# Altium PCB 180222.PcbDoc (part 4 of 5)
Units mil, origin at the board's own origin, x right, y up, seen from the top; angles counter-clockwise.
Board outline 6880.23 x 4505.03 mil, 2 copper layers (Top Layer, Bottom Layer); 136 components, 176 nets, 656 pads, 225 vias.
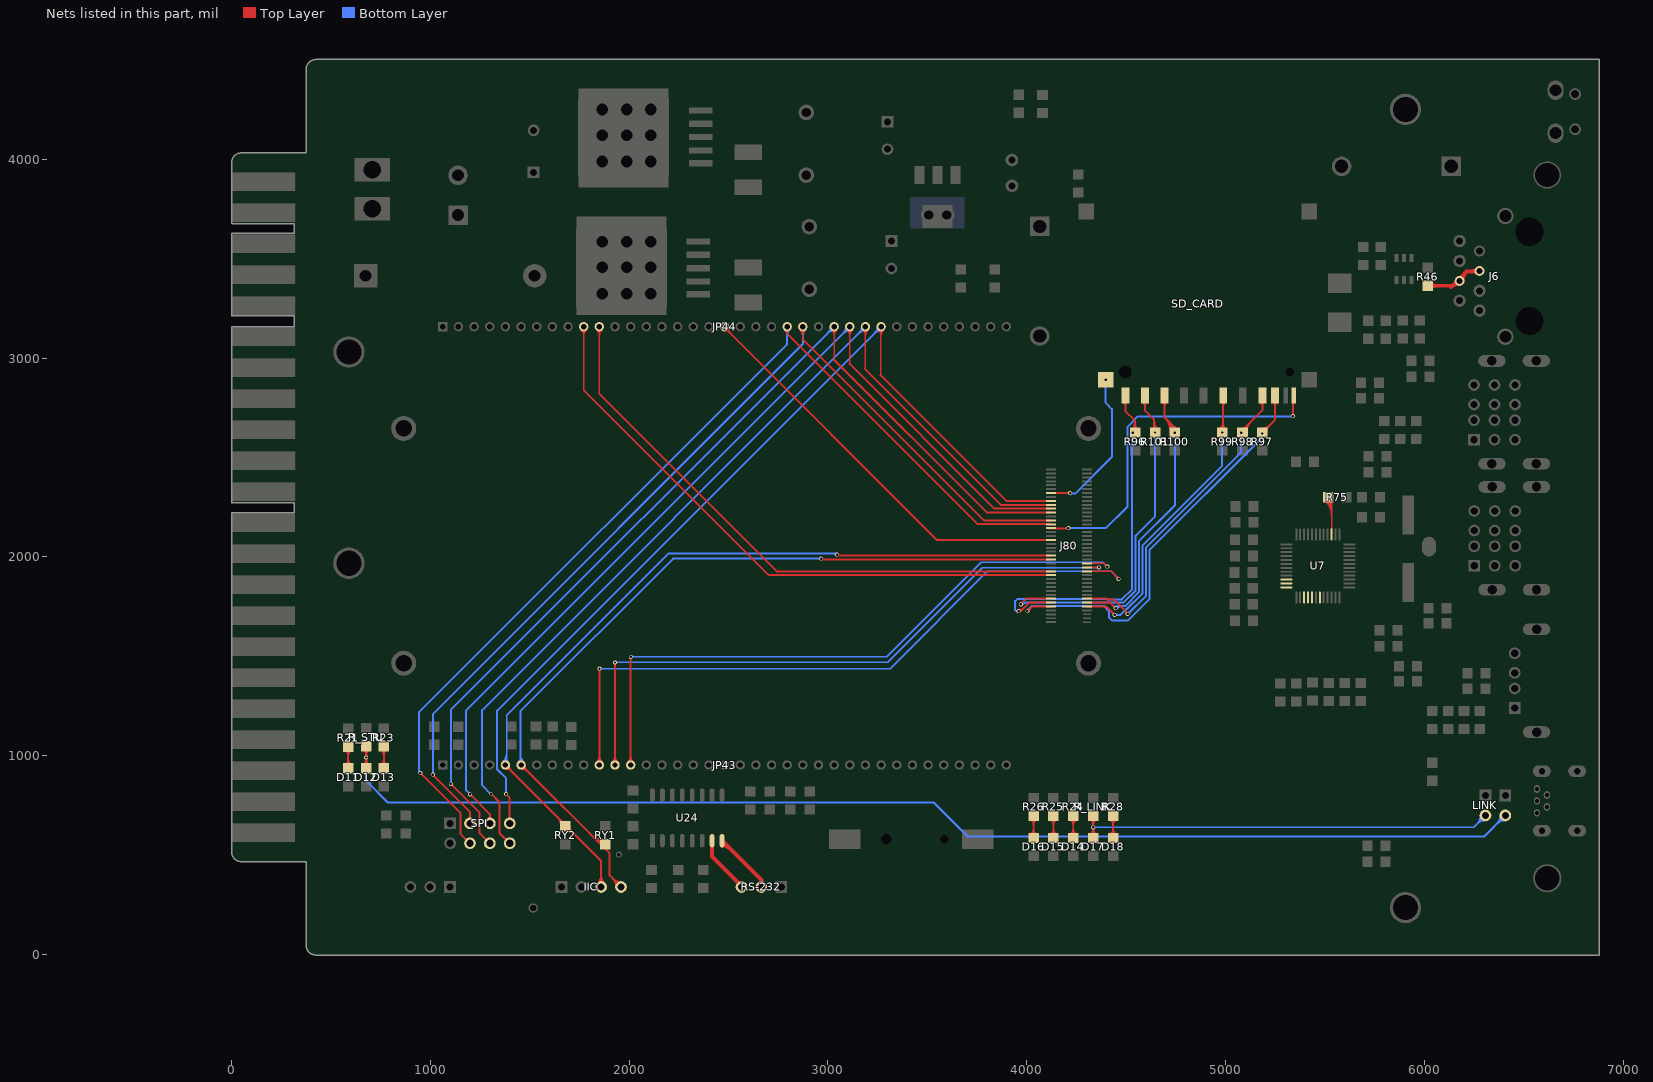
[diagram p4: the nets of this part, all layers, seen from the top]

## Via types
v1: diameter 20, hole 12, Top Layer to Bottom Layer, 169 vias
v2: diameter 30, hole 18, Top Layer to Bottom Layer, 30 vias
v3: diameter 35, hole 20, Top Layer to Bottom Layer, 25 vias
v4: diameter 50, hole 28, Top Layer to Bottom Layer, 1 vias

## Nets (pads, with @x,y where several pads share a name; then routed paths per layer and width w, separated by ;. In a path a pad name is that pad's centre, name@x,y a point inside that pad or via, vN(x,y) a via of type N, cw(c..) or ccw(c..) an arc to the next point about the centre after c; other vN are vias at no path point) (continued)
GPS-PPS: J80.15 JP43.12 | length 3640.2
  Top Layer w7: J80.15@4303.55,1947.73 v1@4366,1947.73 ; 4347.66,1947.73 ccw(c4347.66,1964.34) 4359.4,1952.6 cw(c4347.66,1964.34) 4347.66,1947.73 ; 4348.95,1947.73 cw(c4348.95,1932.95) 4359.4,1943.4 ccw(c4348.95,1932.95) 4348.95,1947.73
  Top Layer w10: v1@1926.22,1465.46 cw(c1918.22,1457.46) 1929.53,1457.46 ; JP43.12@1929.53,953.64 v1@1929.53,1470 ; 1929.53,1456.4 cw(c1942.36,1456.4) v1@1933.29,1465.46 ; JP43.12@1916.37,966.81 ccw(c1884.58,998.6) 1929.53,998.6 ; JP43.12@1916.37,966.81 ccw(c1884.58,998.6) 1929.53,998.6 ; JP43.12@1916.37,966.81 ccw(c1884.58,998.6) 1929.53,998.6 ; 1929.53,998.6 ccw(c1974.49,998.6) JP43.12@1942.7,966.81 ; 1929.53,998.6 ccw(c1974.49,998.6) JP43.12@1942.7,966.81 ; 1929.53,998.6 ccw(c1974.49,998.6) JP43.12@1942.7,966.81 ; v1@1924.78,1466.46 cw(c1913.3,1454.98) 1929.53,1454.98 ccw(c1913.3,1454.98) v1@1924.78,1466.46
  Bottom Layer w7: v1@1929.05,1470 3301,1470 3778,1947 v1@4364,1947 ; v1@1934.35,1464.4 cw(c1947.86,1450.89) 1947.86,1470 ; v1@1934.35,1473.6 ccw(c1943.03,1482.28) 1943.03,1470 ; 1944.01,1470 cw(c1944.01,1485.69) 1932.91,1474.6 ccw(c1944.01,1485.69) 1944.01,1470 ; 1944.01,1470 ccw(c1944.01,1454.31) 1932.91,1465.4 cw(c1944.01,1454.31) 1944.01,1470 ; 4345.89,1947 ccw(c4345.89,1966.11) 4359.4,1952.6 cw(c4345.89,1966.11) 4345.89,1947 ; 4350.72,1947 cw(c4350.72,1934.72) 4359.4,1943.4 ccw(c4350.72,1934.72) 4350.72,1947
  other v1: 1929.76,1469 4364,1948
GPS-TX: J80.16 JP43.13 | length 3725.3
  Top Layer w7: J80.16@4303.55,1969.42 4388.58,1969.42 4406,1952 v1(4406,1951) ; 4329.27,1968.42 ccw(c4329.27,1961.38) 4324.3,1966.36 cw(c4331.69,1958.97) 4331.69,1969.42 ; 4394.2,1963.8 cw(c4381.39,1951) 4399.5,1951 ccw(c4381.39,1951) 4394.2,1963.8 ; 4396.61,1961.39 ccw(c4406,1970.78) 4406,1957.5 cw(c4406,1970.78) 4396.61,1961.39
  Top Layer w10: v1@2005.22,1494.46 cw(c1997.84,1487.09) 2008.27,1487.09 ; JP43.13@2008.27,953.64 v1@2008.27,1499 ; 2008.27,1484.77 cw(c2021.99,1484.77) v1@2012.29,1494.46 ; JP43.13@1995.11,966.81 ccw(c1963.32,998.6) 2008.27,998.6 ; JP43.13@1995.11,966.81 ccw(c1963.32,998.6) 2008.27,998.6 ; JP43.13@1995.11,966.81 ccw(c1963.32,998.6) 2008.27,998.6 ; 2008.27,998.6 ccw(c2053.23,998.6) JP43.13@2021.44,966.81 ; 2008.27,998.6 ccw(c2053.23,998.6) JP43.13@2021.44,966.81 ; 2008.27,998.6 ccw(c2053.23,998.6) JP43.13@2021.44,966.81 ; v1@2003.78,1495.46 cw(c1992.92,1484.61) 2008.27,1484.61 ccw(c1992.92,1484.61) v1@2003.78,1495.46
  Bottom Layer w7: v1@2008.05,1499 3297,1499 3771,1973 4384,1973 v1(4406,1951) ; v1@2013.35,1493.4 cw(c2026.86,1479.89) 2026.86,1499 ; v1@2013.35,1502.6 ccw(c2022.03,1511.28) 2022.03,1499 ; 2023.01,1499 cw(c2023.01,1514.69) 2011.91,1503.6 ccw(c2023.01,1514.69) 2023.01,1499 ; 2023.01,1499 ccw(c2023.01,1483.31) 2011.91,1494.4 cw(c2023.01,1483.31) 2023.01,1499 ; 4394.9,1962.1 cw(c4383.81,1951) v1@4399.5,1951 ; 4394.9,1962.1 ccw(c4406,1973.19) v1@4406,1957.5 ; 4394.9,1962.1 cw(c4383.81,1951) v1@4399.5,1951 ; 4394.9,1962.1 ccw(c4406,1973.19) v1@4406,1957.5 ; 4394.9,1962.1 ccw(c4406,1973.19) v1@4406,1957.5 ; 4394.9,1962.1 cw(c4383.81,1951) v1@4399.5,1951
  other v1: 2008.76,1498
LED1: U7.3
LED2: U7.4
LED3: U7.5
LED4: U7.7
LED5: U7.48
LED6: U7.47
LED7: U7.46
N_SD_DETECT: J80.56 SD_CARD.10 | length 2006.4
  Top Layer w7: v1@4210,2144.42 v1@4211.42,2144.42 ; SD_CARD.10@5343.28,2796 SD_CARD.10@5343.28,2812.4
  Top Layer w10: J80.56@4111.55,2144.42 v1@4210,2144.42 ; 4196.52,2144.42 ccw(c4196.52,2158.48) v1@4206.46,2148.54 ; 4196.92,2144.42 cw(c4196.92,2130.92) v1@4206.46,2140.46 ; 4198.94,2144.42 ccw(c4198.94,2155.06) v1@4206.46,2147.54 ; 4199.34,2144.42 cw(c4199.34,2134.34) v1@4206.46,2141.46 ; v1(5339,2708) SD_CARD.10@5339,2796 ; v1@5335.46,2711.54 ccw(c5326.93,2720.07) 5339,2720.07 ; v1@5335.46,2711.54 ccw(c5326.93,2720.07) 5339,2720.07 ; v1@5335.46,2711.54 ccw(c5326.93,2720.07) 5339,2720.07 ; 5339,2720.07 ccw(c5351.07,2720.07) v1@5342.54,2711.54 ; 5339,2720.07 ccw(c5351.07,2720.07) v1@5342.54,2711.54 ; 5339,2720.07 ccw(c5351.07,2720.07) v1@5342.54,2711.54 ; 5339,2758.06 cw(c5370.07,2758.06) SD_CARD.10@5348.1,2780.03 ; 5339,2758.06 cw(c5370.07,2758.06) SD_CARD.10@5348.1,2780.03 ; 5339,2758.06 cw(c5370.07,2758.06) SD_CARD.10@5348.1,2780.03
  Bottom Layer w10: v1@4211,2145 4399,2145 4508,2254 4508,2655 4560,2707 v1@5341,2707 ; 5324.51,2707 ccw(c5324.51,2722.49) v1@5335.46,2711.54 ; 5324.51,2707 ccw(c5324.51,2722.49) v1@5335.46,2711.54 ; 5324.51,2707 ccw(c5324.51,2722.49) v1@5335.46,2711.54
  other v1: 4210,2145
N_SD_PROTECT: J80.47 SD_CARD.12 | length 885.5
  Top Layer w10: J80.47@4116.55,2322.25 v1@4218.75,2322.25 ; 4202.49,2322.25 cw(c4202.49,2302.49) v1@4216.46,2316.46 ; 4203.49,2321.75 ccw(c4203.49,2341.51) v1@4217.46,2327.54
  Bottom Layer w10: v1@4216,2324 4221,2319 4245,2319 4429,2503 4429,2744 4397,2776 v1@4397,2892 ; v1@4221.54,2315.46 cw(c4230.07,2306.93) 4230.07,2319 ; v1@4224.54,2322.54 ccw(c4233.07,2331.07) 4233.07,2319 ; 4397,2875.69 cw(c4413.85,2875.69) v1@4401.94,2887.61 ; 4397,2875.69 cw(c4413.85,2875.69) v1@4401.94,2887.61 ; 4397,2875.69 cw(c4413.85,2875.69) v1@4401.94,2887.61
  other v1: 4219,2321 4398.4,2891.14
NetC2_1: 
NetC2_2: 
NetC21_2: 
NetC37_1: 
NetC39_1: 
NetC42_1: 
NetC42_2: 
NetD1_2: 
NetD2_2: 
NetD3_2: 
NetD4_2: 
NetD5_2: 
NetD6_2: 
NetD7_2: 
NetD8_2: 
NetD11_2: D11.2 R21.2 | length 577.2
  Top Layer w10: D11.2@587,937 R21.2@587,1045.71 ; D11.2@572.44,951.56 ccw(c537.29,986.71) 587,986.71 ; D11.2@572.44,951.56 ccw(c537.29,986.71) 587,986.71 ; D11.2@572.44,951.56 ccw(c537.29,986.71) 587,986.71 ; R21.2@572.44,1031.15 cw(c537.29,996) 587,996 ; R21.2@572.44,1031.15 cw(c537.29,996) 587,996 ; R21.2@572.44,1031.15 cw(c537.29,996) 587,996 ; 587,986.71 ccw(c636.71,986.71) D11.2@601.56,951.56 ; 587,986.71 ccw(c636.71,986.71) D11.2@601.56,951.56 ; 587,986.71 ccw(c636.71,986.71) D11.2@601.56,951.56 ; 587,996 cw(c636.71,996) R21.2@601.56,1031.15 ; 587,996 cw(c636.71,996) R21.2@601.56,1031.15 ; 587,996 cw(c636.71,996) R21.2@601.56,1031.15
NetD12_2: ?.2@6408,700 D12.2 R_STU.2 | length 7208.1
  Top Layer w7: D12.2@678,930.35 D12.2@678,937
  Top Layer w10: D12.2@678,937 R_STU.2@678,1047.71 ; D12.2@663.44,951.56 ccw(c628.29,986.71) v1@678,986.71 ; D12.2@663.44,951.56 ccw(c628.29,986.71) v1@678,986.71 ; D12.2@663.44,951.56 ccw(c628.29,986.71) v1@678,986.71 ; R_STU.2@663.44,1033.15 cw(c628.3,998) v1@678,998 ; R_STU.2@663.44,1033.15 cw(c628.3,998) v1@678,998 ; R_STU.2@663.44,1033.15 cw(c628.3,998) v1@678,998 ; v1@674.47,987.82 cw(c665.93,979.28) 678,979.28 ; v1@674.47,987.82 cw(c665.93,979.28) 678,979.28 ; v1@674.47,987.82 cw(c665.93,979.28) 678,979.28 ; v1@674.47,994.89 ccw(c665.93,1003.42) 678,1003.43 ; v1@674.47,994.89 ccw(c665.93,1003.42) 678,1003.43 ; v1@674.47,994.89 ccw(c665.93,1003.42) 678,1003.43 ; 678,979.28 cw(c690.07,979.28) v1@681.54,987.82 ; 678,979.28 cw(c690.07,979.28) v1@681.54,987.82 ; 678,979.28 cw(c690.07,979.28) v1@681.54,987.82 ; v1@678,986.71 ccw(c727.71,986.71) D12.2@692.56,951.56 ; v1@678,986.71 ccw(c727.71,986.71) D12.2@692.56,951.56 ; v1@678,986.71 ccw(c727.71,986.71) D12.2@692.56,951.56 ; v1@678,997.99 cw(c727.72,997.99) R_STU.2@692.56,1033.15 ; v1@678,997.99 cw(c727.72,997.99) R_STU.2@692.56,1033.15 ; v1@678,997.99 cw(c727.72,997.99) R_STU.2@692.56,1033.15 ; 678,1003.43 ccw(c690.07,1003.43) v1@681.54,994.89 ; 678,1003.43 ccw(c690.07,1003.43) v1@681.54,994.89 ; 678,1003.43 ccw(c690.07,1003.43) v1@681.54,994.89
  Bottom Layer w10: v1(678,991.35) 678,874 787,765 3534,765 3705,594 6302,594 ?.2@6408,700 ; v1@674.47,987.82 cw(c665.93,979.28) 678,979.28 ; v1@674.47,987.82 cw(c665.93,979.28) 678,979.28 ; v1@674.47,987.82 cw(c665.93,979.28) 678,979.28 ; 678,979.28 cw(c690.07,979.28) v1@681.54,987.82 ; 678,979.28 cw(c690.07,979.28) v1@681.54,987.82 ; 678,979.28 cw(c690.07,979.28) v1@681.54,987.82 ; 6366.13,658.13 cw(c6408,616.26) ?.2@6408,675.47 ; 6366.13,658.13 ccw(c6324.26,700) ?.2@6383.47,700 ; 6366.13,658.13 cw(c6408,616.26) ?.2@6408,675.47 ; 6366.13,658.13 ccw(c6324.26,700) ?.2@6383.47,700 ; 6366.13,658.13 ccw(c6324.26,700) ?.2@6383.47,700 ; 6366.13,658.13 cw(c6408,616.26) ?.2@6408,675.47 ; 6383.2,675.2 cw(c6408,650.4) ?.2@6408,685.47 ; 6383.2,675.2 ccw(c6358.4,700) ?.2@6393.47,700 ; 6383.2,675.2 cw(c6408,650.4) ?.2@6408,685.47 ; 6383.2,675.2 ccw(c6358.4,700) ?.2@6393.47,700 ; 6383.2,675.2 ccw(c6358.4,700) ?.2@6393.47,700 ; 6383.2,675.2 cw(c6408,650.4) ?.2@6408,685.47
NetD13_2: D13.2 R23.2 | length 586.9
  Top Layer w7: D13.2@767,928.35 D13.2@767,937 ; R23.2@767,1041.35 R23.2@767,1046.71
  Top Layer w10: D13.2@767,937 R23.2@767,1041.35 ; D13.2@752.44,951.56 ccw(c717.29,986.71) 767,986.71 ; D13.2@752.44,951.56 ccw(c717.29,986.71) 767,986.71 ; D13.2@752.44,951.56 ccw(c717.29,986.71) 767,986.71 ; R23.2@752.44,1032.15 cw(c717.3,997) 767,997 ; R23.2@752.44,1032.15 cw(c717.3,997) 767,997 ; R23.2@752.44,1032.15 cw(c717.3,997) 767,997 ; 767,986.71 ccw(c816.71,986.71) D13.2@781.56,951.56 ; 767,986.71 ccw(c816.71,986.71) D13.2@781.56,951.56 ; 767,986.71 ccw(c816.71,986.71) D13.2@781.56,951.56 ; 767,996.99 cw(c816.72,996.99) R23.2@781.56,1032.15 ; 767,996.99 cw(c816.72,996.99) R23.2@781.56,1032.15 ; 767,996.99 cw(c816.72,996.99) R23.2@781.56,1032.15
NetD14_2: D14.2 R24.2 | length 1025.1
  Top Layer w7: R24.2@4235,697.35 4235,560 ; D14.2@4219.38,602.27 ccw(c4181.67,639.98) 4235,639.98 ; D14.2@4219.38,602.27 ccw(c4181.67,639.98) 4235,639.98 ; D14.2@4219.38,602.27 ccw(c4181.67,639.98) 4235,639.98 ; R24.2@4219.38,681.73 cw(c4181.67,644.02) 4235,644.02 ; R24.2@4219.38,681.73 cw(c4181.67,644.02) 4235,644.02 ; R24.2@4219.38,681.73 cw(c4181.67,644.02) 4235,644.02 ; D14.2@4224.33,597.32 ccw(c4198.57,623.08) 4235,623.08 ; D14.2@4224.33,597.32 ccw(c4198.57,623.08) 4235,623.08 ; D14.2@4224.33,597.32 ccw(c4198.57,623.08) 4235,623.08 ; R24.2@4224.33,686.68 cw(c4198.57,660.92) 4235,660.92 ; R24.2@4224.33,686.68 cw(c4198.57,660.92) 4235,660.92 ; R24.2@4224.33,686.68 cw(c4198.57,660.92) 4235,660.92 ; D14.2@4230.91,564.94 cw(c4229.98,560) 4235,560 ; D14.2@4230.91,564.94 cw(c4229.98,560) 4235,560 ; D14.2@4230.91,564.94 cw(c4229.98,560) 4235,560 ; 4235,560 cw(c4240.03,560) D14.2@4239.09,564.94 ; 4235,560 cw(c4240.03,560) D14.2@4239.09,564.94 ; 4235,560 cw(c4240.03,560) D14.2@4239.09,564.94 ; 4235,623.08 ccw(c4271.43,623.08) D14.2@4245.67,597.32 ; 4235,623.08 ccw(c4271.43,623.08) D14.2@4245.67,597.32 ; 4235,623.08 ccw(c4271.43,623.08) D14.2@4245.67,597.32 ; 4235,639.98 ccw(c4288.33,639.98) D14.2@4250.62,602.27 ; 4235,639.98 ccw(c4288.33,639.98) D14.2@4250.62,602.27 ; 4235,639.98 ccw(c4288.33,639.98) D14.2@4250.62,602.27 ; 4235,644.02 cw(c4288.33,644.02) R24.2@4250.62,681.73 ; 4235,644.02 cw(c4288.33,644.02) R24.2@4250.62,681.73 ; 4235,644.02 cw(c4288.33,644.02) R24.2@4250.62,681.73 ; 4235,660.92 cw(c4271.43,660.92) R24.2@4245.67,686.68 ; 4235,660.92 cw(c4271.43,660.92) R24.2@4245.67,686.68 ; 4235,660.92 cw(c4271.43,660.92) R24.2@4245.67,686.68
NetD15_2: D15.2 R25.2 | length 975.3
  Top Layer w7: D15.2@4135,568 R25.2@4135,697.35 ; D15.2@4119.38,602.27 ccw(c4081.66,639.98) 4135,639.98 ; D15.2@4119.38,602.27 ccw(c4081.66,639.98) 4135,639.98 ; D15.2@4119.38,602.27 ccw(c4081.66,639.98) 4135,639.98 ; R25.2@4119.38,681.73 cw(c4081.67,644.02) 4135,644.02 ; R25.2@4119.38,681.73 cw(c4081.67,644.02) 4135,644.02 ; R25.2@4119.38,681.73 cw(c4081.67,644.02) 4135,644.02 ; D15.2@4124.33,597.32 ccw(c4098.56,623.08) 4135,623.08 ; D15.2@4124.33,597.32 ccw(c4098.56,623.08) 4135,623.08 ; D15.2@4124.33,597.32 ccw(c4098.56,623.08) 4135,623.08 ; R25.2@4124.33,686.68 cw(c4098.57,660.92) 4135,660.92 ; R25.2@4124.33,686.68 cw(c4098.57,660.92) 4135,660.92 ; R25.2@4124.33,686.68 cw(c4098.57,660.92) 4135,660.92 ; 4135,623.07 ccw(c4171.43,623.07) D15.2@4145.67,597.32 ; 4135,623.07 ccw(c4171.43,623.07) D15.2@4145.67,597.32 ; 4135,623.07 ccw(c4171.43,623.07) D15.2@4145.67,597.32 ; 4135,639.97 ccw(c4188.33,639.97) D15.2@4150.62,602.27 ; 4135,639.97 ccw(c4188.33,639.97) D15.2@4150.62,602.27 ; 4135,639.97 ccw(c4188.33,639.97) D15.2@4150.62,602.27 ; 4135,644.02 cw(c4188.33,644.02) R25.2@4150.62,681.73 ; 4135,644.02 cw(c4188.33,644.02) R25.2@4150.62,681.73 ; 4135,644.02 cw(c4188.33,644.02) R25.2@4150.62,681.73 ; 4135,660.92 cw(c4171.43,660.92) R25.2@4145.67,686.68 ; 4135,660.92 cw(c4171.43,660.92) R25.2@4145.67,686.68 ; 4135,660.92 cw(c4171.43,660.92) R25.2@4145.67,686.68
NetD16_2: D16.2 R26.2 | length 961.3
  Top Layer w7: D16.2@4035,582 R26.2@4035,697.35 ; D16.2@4019.38,602.27 ccw(c3981.66,639.98) 4035,639.98 ; D16.2@4019.38,602.27 ccw(c3981.66,639.98) 4035,639.98 ; D16.2@4019.38,602.27 ccw(c3981.66,639.98) 4035,639.98 ; R26.2@4019.38,681.73 cw(c3981.67,644.02) 4035,644.02 ; R26.2@4019.38,681.73 cw(c3981.67,644.02) 4035,644.02 ; R26.2@4019.38,681.73 cw(c3981.67,644.02) 4035,644.02 ; D16.2@4024.33,597.32 ccw(c3998.56,623.08) 4035,623.08 ; D16.2@4024.33,597.32 ccw(c3998.56,623.08) 4035,623.08 ; D16.2@4024.33,597.32 ccw(c3998.56,623.08) 4035,623.08 ; R26.2@4024.33,686.68 cw(c3998.57,660.92) 4035,660.92 ; R26.2@4024.33,686.68 cw(c3998.57,660.92) 4035,660.92 ; R26.2@4024.33,686.68 cw(c3998.57,660.92) 4035,660.92 ; 4035,623.07 ccw(c4071.43,623.07) D16.2@4045.67,597.32 ; 4035,623.07 ccw(c4071.43,623.07) D16.2@4045.67,597.32 ; 4035,623.07 ccw(c4071.43,623.07) D16.2@4045.67,597.32 ; 4035,639.97 ccw(c4088.33,639.97) D16.2@4050.62,602.27 ; 4035,639.97 ccw(c4088.33,639.97) D16.2@4050.62,602.27 ; 4035,639.97 ccw(c4088.33,639.97) D16.2@4050.62,602.27 ; 4035,644.02 cw(c4088.33,644.02) R26.2@4050.62,681.73 ; 4035,644.02 cw(c4088.33,644.02) R26.2@4050.62,681.73 ; 4035,644.02 cw(c4088.33,644.02) R26.2@4050.62,681.73 ; 4035,660.92 cw(c4071.43,660.92) R26.2@4045.67,686.68 ; 4035,660.92 cw(c4071.43,660.92) R26.2@4045.67,686.68 ; 4035,660.92 cw(c4071.43,660.92) R26.2@4045.67,686.68
NetD17_2: D17.2 LINK.2 R_LINK.2 | length 3703.6
  Top Layer w7: D17.2@4335,572 v1(4335,640) ; R_LINK.2@4335,697.35 v1(4335,640) ; D17.2@4319.38,602.27 ccw(c4281.66,639.98) v1(4335,640) ; D17.2@4319.38,602.27 ccw(c4281.66,639.98) v1(4335,640) ; D17.2@4319.38,602.27 ccw(c4281.66,639.98) v1(4335,640) ; R_LINK.2@4319.38,681.73 cw(c4281.67,644.02) v1@4335,644.02 ; R_LINK.2@4319.38,681.73 cw(c4281.67,644.02) v1@4335,644.02 ; R_LINK.2@4319.38,681.73 cw(c4281.67,644.02) v1@4335,644.02 ; D17.2@4324.33,597.32 ccw(c4298.56,623.08) 4335,623.08 ; D17.2@4324.33,597.32 ccw(c4298.56,623.08) 4335,623.08 ; D17.2@4324.33,597.32 ccw(c4298.56,623.08) 4335,623.08 ; R_LINK.2@4324.33,686.68 cw(c4298.57,660.92) 4335,660.92 ; R_LINK.2@4324.33,686.68 cw(c4298.57,660.92) 4335,660.92 ; R_LINK.2@4324.33,686.68 cw(c4298.57,660.92) 4335,660.92 ; v1@4330.4,635.4 cw(c4319.31,624.31) 4335,624.31 ; v1@4330.4,635.4 cw(c4319.31,624.31) 4335,624.31 ; v1@4330.4,635.4 cw(c4319.31,624.31) 4335,624.31 ; v1@4330.4,644.6 ccw(c4319.31,655.69) 4335,655.69 ; v1@4330.4,644.6 ccw(c4319.31,655.69) 4335,655.69 ; v1@4330.4,644.6 ccw(c4319.31,655.69) 4335,655.69 ; 4335,623.07 ccw(c4371.43,623.07) D17.2@4345.67,597.32 ; 4335,623.07 ccw(c4371.43,623.07) D17.2@4345.67,597.32 ; 4335,623.07 ccw(c4371.43,623.07) D17.2@4345.67,597.32 ; 4335,624.31 cw(c4350.69,624.31) v1@4339.6,635.4 ; 4335,624.31 cw(c4350.69,624.31) v1@4339.6,635.4 ; 4335,624.31 cw(c4350.69,624.31) v1@4339.6,635.4 ; v1(4335,640) ccw(c4388.33,639.97) D17.2@4350.62,602.27 ; v1(4335,640) ccw(c4388.33,639.97) D17.2@4350.62,602.27 ; v1(4335,640) ccw(c4388.33,639.97) D17.2@4350.62,602.27 ; v1@4335,644.02 cw(c4388.33,644.02) R_LINK.2@4350.62,681.73 ; v1@4335,644.02 cw(c4388.33,644.02) R_LINK.2@4350.62,681.73 ; v1@4335,644.02 cw(c4388.33,644.02) R_LINK.2@4350.62,681.73 ; 4335,655.69 ccw(c4350.69,655.69) v1@4339.6,644.6 ; 4335,655.69 ccw(c4350.69,655.69) v1@4339.6,644.6 ; 4335,655.69 ccw(c4350.69,655.69) v1@4339.6,644.6 ; 4335,660.92 cw(c4371.43,660.92) R_LINK.2@4345.67,686.68 ; 4335,660.92 cw(c4371.43,660.92) R_LINK.2@4345.67,686.68 ; 4335,660.92 cw(c4371.43,660.92) R_LINK.2@4345.67,686.68
  Bottom Layer w7: v1(4335,640) 6248,640 LINK.2@6308,700 ; v1@4339.6,635.4 cw(c4350.69,624.31) 4350.69,640 ; v1@4339.6,635.4 cw(c4350.69,624.31) 4350.69,640 ; v1@4339.6,635.4 cw(c4350.69,624.31) 4350.69,640 ; v1@4339.6,644.6 ccw(c4350.69,655.69) 4350.69,640 ; v1@4339.6,644.6 ccw(c4350.69,655.69) 4350.69,640 ; v1@4339.6,644.6 ccw(c4350.69,655.69) 4350.69,640 ; 6263.57,655.57 cw(c6308,611.14) LINK.2@6308,673.97 ; 6263.57,655.57 ccw(c6219.14,700) LINK.2@6281.97,700 ; 6263.57,655.57 cw(c6308,611.14) LINK.2@6308,673.97 ; 6263.57,655.57 ccw(c6219.14,700) LINK.2@6281.97,700 ; 6263.57,655.57 ccw(c6219.14,700) LINK.2@6281.97,700 ; 6263.57,655.57 cw(c6308,611.14) LINK.2@6308,673.97 ; 6275.52,667.52 cw(c6308,635.04) LINK.2@6308,680.97 ; 6275.52,667.52 ccw(c6243.04,700) LINK.2@6288.97,700 ; 6275.52,667.52 cw(c6308,635.04) LINK.2@6308,680.97 ; 6275.52,667.52 ccw(c6243.04,700) LINK.2@6288.97,700 ; 6275.52,667.52 ccw(c6243.04,700) LINK.2@6288.97,700 ; 6275.52,667.52 cw(c6308,635.04) LINK.2@6308,680.97
NetD18_2: D18.2 R28.2 | length 939.3
  Top Layer w7: D18.2@4435,604 R28.2@4435,697.35 ; D18.2@4419.38,602.27 ccw(c4381.66,639.98) 4435,639.98 ; D18.2@4419.38,602.27 ccw(c4381.66,639.98) 4435,639.98 ; D18.2@4419.38,602.27 ccw(c4381.66,639.98) 4435,639.98 ; R28.2@4419.38,681.73 cw(c4381.67,644.02) 4435,644.02 ; R28.2@4419.38,681.73 cw(c4381.67,644.02) 4435,644.02 ; R28.2@4419.38,681.73 cw(c4381.67,644.02) 4435,644.02 ; D18.2@4424.33,597.32 ccw(c4398.56,623.08) 4435,623.08 ; D18.2@4424.33,597.32 ccw(c4398.56,623.08) 4435,623.08 ; D18.2@4424.33,597.32 ccw(c4398.56,623.08) 4435,623.08 ; R28.2@4424.33,686.68 cw(c4398.57,660.92) 4435,660.92 ; R28.2@4424.33,686.68 cw(c4398.57,660.92) 4435,660.92 ; R28.2@4424.33,686.68 cw(c4398.57,660.92) 4435,660.92 ; 4435,623.07 ccw(c4471.43,623.07) D18.2@4445.67,597.32 ; 4435,623.07 ccw(c4471.43,623.07) D18.2@4445.67,597.32 ; 4435,623.07 ccw(c4471.43,623.07) D18.2@4445.67,597.32 ; 4435,639.97 ccw(c4488.33,639.97) D18.2@4450.62,602.27 ; 4435,639.97 ccw(c4488.33,639.97) D18.2@4450.62,602.27 ; 4435,639.97 ccw(c4488.33,639.97) D18.2@4450.62,602.27 ; 4435,644.02 cw(c4488.33,644.02) R28.2@4450.62,681.73 ; 4435,644.02 cw(c4488.33,644.02) R28.2@4450.62,681.73 ; 4435,644.02 cw(c4488.33,644.02) R28.2@4450.62,681.73 ; 4435,660.92 cw(c4471.43,660.92) R28.2@4445.67,686.68 ; 4435,660.92 cw(c4471.43,660.92) R28.2@4445.67,686.68 ; 4435,660.92 cw(c4471.43,660.92) R28.2@4445.67,686.68
NetEU5_1: 
NetJ2_4: J6.4 J6.5 R46.2 | length 924.3
  Top Layer w20: R46.2@6018,3364.35 6141.35,3364.35 6214,3437 J6.5@6273,3437 ; R46.2@6030.01,3353.33 cw(c6056.62,3326.72) 6056.62,3364.35 ; R46.2@6030.01,3353.33 cw(c6056.62,3326.72) 6056.62,3364.35 ; R46.2@6030.01,3353.33 cw(c6056.62,3326.72) 6056.62,3364.35 ; R46.2@6030.01,3375.38 ccw(c6056.62,3401.99) 6056.62,3364.35 ; R46.2@6030.01,3375.38 ccw(c6056.62,3401.99) 6056.62,3364.35 ; R46.2@6030.01,3375.38 ccw(c6056.62,3401.99) 6056.62,3364.35 ; 6135.36,3358.36 cw(c6173.48,3320.23) J6.4@6177.02,3374.03 ; 6135.36,3358.36 cw(c6173.48,3320.23) J6.4@6177.02,3374.03 ; 6135.36,3358.36 cw(c6173.48,3320.23) J6.4@6177.02,3374.03 ; J6.4@6193,3389 cw(c6258.18,3389) 6212.09,3435.09 ; J6.4@6193,3389 cw(c6258.18,3389) 6212.09,3435.09 ; J6.4@6193,3389 cw(c6258.18,3389) 6212.09,3435.09 ; 6236.96,3437 ccw(c6236.96,3480.04) J6.5@6267.39,3449.61 ; 6236.96,3437 ccw(c6236.96,3480.04) J6.5@6267.39,3449.61 ; 6236.96,3437 ccw(c6236.96,3480.04) J6.5@6267.39,3449.61 ; 6246.62,3437 cw(c6246.62,3407.62) J6.5@6267.39,3428.39 ; 6246.62,3437 cw(c6246.62,3407.62) J6.5@6267.39,3428.39 ; 6246.62,3437 cw(c6246.62,3407.62) J6.5@6267.39,3428.39
NetR5_1: 
NetR6_1: 
NetR8_1: 
NetR45_1: 
NetR60_2: 
NTRST: J80.14 JP43.11 | length 3988.9
  Top Layer w7: J80.14@4303.55,1927.05 4425.95,1927.05 v1@4464.5,1888.5 ; 4451.9,1901.1 cw(c4440.81,1890) v1@4456.5,1890 ; 4451.9,1901.1 ccw(c4463,1912.19) v1@4463,1896.5 ; 4451.9,1901.1 cw(c4440.81,1890) v1@4456.5,1890 ; 4451.9,1901.1 ccw(c4463,1912.19) v1@4463,1896.5 ; 4451.9,1901.1 ccw(c4463,1912.19) v1@4463,1896.5 ; 4451.9,1901.1 cw(c4440.81,1890) v1@4456.5,1890 ; J80.14@4324.3,1929.11 ccw(c4329.27,1934.08) 4329.27,1927.05 cw(c4329.27,1934.08) J80.14@4324.3,1929.11
  Top Layer w10: JP43.11@1850.79,953.64 v1@1850.79,1439 ; 1850.79,1423.61 cw(c1866.14,1423.61) v1@1855.29,1434.46 ; JP43.11@1837.63,966.81 ccw(c1805.84,998.6) 1850.79,998.6 ; JP43.11@1837.63,966.81 ccw(c1805.84,998.6) 1850.79,998.6 ; JP43.11@1837.63,966.81 ccw(c1805.84,998.6) 1850.79,998.6 ; 1850.79,998.6 ccw(c1895.75,998.6) JP43.11@1863.96,966.81 ; 1850.79,998.6 ccw(c1895.75,998.6) JP43.11@1863.96,966.81 ; 1850.79,998.6 ccw(c1895.75,998.6) JP43.11@1863.96,966.81 ; v1@1846.78,1435.46 cw(c1837.08,1425.77) 1850.79,1425.77 ccw(c1837.08,1425.77) v1@1846.78,1435.46 ; v1@1850.79,1428.09 cw(c1861.23,1428.09) 1853.85,1435.46 ccw(c1861.23,1428.09) v1@1850.79,1428.09
  Bottom Layer w7: v1@1850.79,1439 3313,1439 3801.5,1927.5 4424.5,1927.5 v1@4464,1888 ; v1@1856.35,1433.4 cw(c1869.86,1419.89) 1869.86,1439 ; v1@1856.35,1442.6 ccw(c1865.03,1451.28) 1865.03,1439 ; 1866.01,1439 cw(c1866.01,1454.69) 1854.91,1443.6 ccw(c1866.01,1454.69) 1866.01,1439 ; 1866.01,1439 ccw(c1866.01,1423.31) 1854.91,1434.4 cw(c1866.01,1423.31) 1866.01,1439 ; 4450.2,1901.8 ccw(c4463,1914.61) v1@4463,1896.5 ; 4450.2,1901.8 ccw(c4463,1914.61) v1@4463,1896.5 ; 4450.2,1901.8 ccw(c4463,1914.61) v1@4463,1896.5 ; 4452.61,1899.39 cw(c4443.22,1890) v1@4456.5,1890 ; 4452.61,1899.39 cw(c4443.22,1890) v1@4456.5,1890 ; 4452.61,1899.39 cw(c4443.22,1890) v1@4456.5,1890
  other v1: 1851.76,1438 4463,1890
R_D: RS-232.2 U24.8 | length 366.1
  Top Layer w20: U24.8@2468,549.54 cw(c2468,492.89) 2508.06,532.94 ; U24.8@2468,569.54 cw(c2468,561.17) U24.8@2473.91,567.09 ; U24.8@2468,573 2666,375 RS-232.2@2666,340
REXT: R75.2 U7.27 | length 1077
  Top Layer w7: U7.27@5533.78,2113.81 R75.2@5533.78,2300 ; R75.2@5501.73,2283.39 cw(c5424.37,2206.03) 5533.78,2206.03 ; R75.2@5501.73,2283.39 cw(c5424.37,2206.03) 5533.78,2206.03 ; R75.2@5501.73,2283.39 cw(c5424.37,2206.03) 5533.78,2206.03 ; R75.2@5506.68,2288.34 cw(c5441.27,2222.93) 5533.78,2222.93 ; R75.2@5506.68,2288.34 cw(c5441.27,2222.93) 5533.78,2222.93 ; R75.2@5506.68,2288.34 cw(c5441.27,2222.93) 5533.78,2222.93 ; R75.2@5511.63,2293.29 cw(c5458.17,2239.83) 5533.78,2239.83 ; R75.2@5511.63,2293.29 cw(c5458.17,2239.83) 5533.78,2239.83 ; R75.2@5511.63,2293.29 cw(c5458.17,2239.83) 5533.78,2239.83 ; R75.2@5516.58,2298.24 cw(c5475.07,2256.73) 5533.78,2256.73 ; R75.2@5516.58,2298.24 cw(c5475.07,2256.73) 5533.78,2256.73 ; R75.2@5516.58,2298.24 cw(c5475.07,2256.73) 5533.78,2256.73 ; R75.2@5521.53,2303.19 cw(c5491.97,2273.63) R75.2@5533.78,2273.63 ; R75.2@5521.53,2303.19 cw(c5491.97,2273.63) R75.2@5533.78,2273.63 ; R75.2@5521.53,2303.19 cw(c5491.97,2273.63) R75.2@5533.78,2273.63
RTCK: J80.59 JP44.19 | length 2482.6
  Top Layer w7: JP44.19@2480.72,3138.24 cw(c2480.72,3101.92) 2506.4,3127.6 ; JP44.19@2480.72,3138.24 cw(c2480.72,3101.92) 2506.4,3127.6 ; JP44.19@2480.72,3138.24 cw(c2480.72,3101.92) 2506.4,3127.6 ; JP44.19@2486.84,3158.36 ccw(c2513.88,3158.36) 2494.76,3139.24 ; JP44.19@2486.84,3158.36 ccw(c2513.88,3158.36) 2494.76,3139.24 ; JP44.19@2486.84,3158.36 ccw(c2513.88,3158.36) 2494.76,3139.24 ; JP44.19@2493.84,3158.36 ccw(c2537.78,3158.36) 2506.71,3127.29 ; JP44.19@2493.84,3158.36 ccw(c2537.78,3158.36) 2506.71,3127.29 ; JP44.19@2493.84,3158.36 ccw(c2537.78,3158.36) 2506.71,3127.29 ; JP44.19@2500.84,3158.36 ccw(c2561.68,3158.36) 2518.66,3115.34 ; JP44.19@2500.84,3158.36 ccw(c2561.68,3158.36) 2518.66,3115.34 ; JP44.19@2500.84,3158.36 ccw(c2561.68,3158.36) 2518.66,3115.34
  Top Layer w10: JP44.19@2479,3155 3548.47,2085.53 J80.59@4122.45,2085.53
SCL: IIC.4 J80.64 JP43.6 RY1.2 | length 4609.1
  Top Layer w10: JP43.6@1457.09,935.02 cw(c1457.09,890.06) 1488.88,921.85 cw(c1520.67,953.64) JP43.6@1475.72,953.64 ; JP43.6@1457.09,953.64 1902,508.73 1902,399 IIC.4@1959,342 ; 1803.51,607.22 ccw(c1879.02,682.72) RY1.2@1879.02,575.94 ; 1820.58,590.15 ccw(c1879.02,648.58) RY1.2@1879.02,565.94 ; 1837.65,573.08 ccw(c1879.02,614.44) RY1.2@1879.02,555.94 ; 1917.42,383.58 cw(c1873.84,340) IIC.4@1935.47,340 ; 1919.84,381.16 ccw(c1960,421.33) IIC.4@1960,364.53 ; 1934.49,366.51 cw(c1907.99,340) IIC.4@1945.47,340 ; 1936.91,364.09 ccw(c1960,387.19) IIC.4@1960,354.53 ; v1@2972.9,1987.1 J80.64@4122.45,1987.1
  Bottom Layer w7: JP43.6@1442.87,967.87 ccw(c1415.99,994.75) 1454,994.75 ; JP43.6@1447.82,962.92 ccw(c1432.88,977.85) 1454,977.85 ; 1454,992.79 ccw(c1496.24,992.79) JP43.6@1466.37,962.92 ; 1454,1009.69 ccw(c1513.14,1009.69) JP43.6@1471.32,967.87
  Bottom Layer w10: JP43.6@1454,953.64 1454,1223 2222.4,1991.4 v1(2966.84,1991.4)
SD_CLK: J80.5 R99.1 SD_CARD.5 | length 2177.1
  Top Layer w7: v1(4984,2625.91) R99.1@4984,2632.95
  Top Layer w10: J80.5@4303.55,1750.88 4400.12,1750.88 v1@4442,1709 ; R99.1@4988.95,2632.95 SD_CARD.5@4988.95,2812.4 ; R99.1@4970.43,2640.47 ccw(c4925.7,2685.2) 4988.95,2685.2 ; R99.1@4970.43,2640.47 ccw(c4925.7,2685.2) 4988.95,2685.2 ; R99.1@4970.43,2640.47 ccw(c4925.7,2685.2) 4988.95,2685.2 ; R99.1@4977.5,2633.39 ccw(c4949.84,2661.05) 4988.95,2661.05 ; R99.1@4977.5,2633.39 ccw(c4949.84,2661.05) 4988.95,2661.05 ; R99.1@4977.5,2633.39 ccw(c4949.84,2661.05) 4988.95,2661.05 ; SD_CARD.5@4978.57,2782.33 cw(c4953.5,2757.26) 4988.95,2757.26 ; SD_CARD.5@4978.57,2782.33 cw(c4953.5,2757.26) 4988.95,2757.26 ; SD_CARD.5@4978.57,2782.33 cw(c4953.5,2757.26) 4988.95,2757.26 ; R99.1@4980.47,2629.44 ccw(c4959.97,2649.93) R99.1@4988.95,2649.93 ; R99.1@4980.47,2629.44 ccw(c4959.97,2649.93) R99.1@4988.95,2649.93 ; R99.1@4980.47,2629.44 ccw(c4959.97,2649.93) R99.1@4988.95,2649.93 ; 4988.95,2666.04 ccw(c5025.12,2666.04) R99.1@4999.54,2640.47 ; 4988.95,2666.04 ccw(c5025.12,2666.04) R99.1@4999.54,2640.47 ; 4988.95,2666.04 ccw(c5025.12,2666.04) R99.1@4999.54,2640.47 ; 4988.95,2757.26 cw(c5024.41,2757.26) SD_CARD.5@4999.34,2782.33 ; 4988.95,2757.26 cw(c5024.41,2757.26) SD_CARD.5@4999.34,2782.33 ; 4988.95,2757.26 cw(c5024.41,2757.26) SD_CARD.5@4999.34,2782.33 ; 4432.76,1718.24 ccw(c4443,1728.49) 4443,1714 cw(c4443,1728.49) 4432.76,1718.24 ; 4435.17,1715.83 cw(c4428.34,1709) 4438,1709 ccw(c4428.34,1709) 4435.17,1715.83
  Bottom Layer w10: v1(4443,1709) 4472,1709 4486,1723 4486,1723.11 4498.89,1736 4502.41,1736 4582.16,1815.75 4582.16,2057.16 4983,2458 v1@4983,2627 ; 4455.07,1709 cw(c4455.07,1721.07) 4446.54,1712.54 ccw(c4455.07,1721.07) 4455.07,1709 ; 4455.07,1709 ccw(c4455.07,1696.93) 4446.54,1705.46 cw(c4455.07,1696.93) 4455.07,1709 ; 4983,2611.42 cw(c4998.49,2611.42) v1@4987.54,2622.37 ; 4983,2611.42 cw(c4998.49,2611.42) v1@4987.54,2622.37 ; 4983,2611.42 cw(c4998.49,2611.42) v1@4987.54,2622.37
SD_CMD: J80.6 R100.1 SD_CARD.2 | length 2583
  Top Layer w7: v1@4447,1742 v1@4450,1739 ; R100.1@4746,2625.91 4746,2651 4746,2656 ; R100.1@4739.38,2646.98 ccw(c4736.55,2656) 4746,2656 ; R100.1@4739.38,2646.98 ccw(c4736.55,2656) 4746,2656 ; R100.1@4739.38,2646.98 ccw(c4736.55,2656) 4746,2656 ; R100.1@4741.4,2629.6 ccw(c4730.31,2640.69) R100.1@4746,2640.69 ; R100.1@4741.4,2629.6 ccw(c4730.31,2640.69) R100.1@4746,2640.69 ; R100.1@4741.4,2629.6 ccw(c4730.31,2640.69) R100.1@4746,2640.69 ; R100.1@4746,2640.69 ccw(c4761.69,2640.69) R100.1@4750.6,2629.6 ; R100.1@4746,2640.69 ccw(c4761.69,2640.69) R100.1@4750.6,2629.6 ; R100.1@4746,2640.69 ccw(c4761.69,2640.69) R100.1@4750.6,2629.6 ; 4746,2656 ccw(c4755.45,2656) R100.1@4752.62,2646.98 ; 4746,2656 ccw(c4755.45,2656) R100.1@4752.62,2646.98 ; 4746,2656 ccw(c4755.45,2656) R100.1@4752.62,2646.98
  Top Layer w10: J80.6@4303.55,1770.57 4304.12,1770 4421,1770 v1(4448,1743) ; SD_CARD.2@4693.68,2812.4 4693.68,2703.32 4746,2651 R100.1@4747,2650 ; 4439.46,1751.54 cw(c4430.93,1743) 4443,1743 ccw(c4430.93,1743) 4439.46,1751.54 ; 4439.46,1751.54 ccw(c4448,1760.07) 4448,1748 cw(c4448,1760.07) 4439.46,1751.54 ; SD_CARD.2@4683.29,2782.33 cw(c4658.22,2757.26) 4693.68,2757.26 ; SD_CARD.2@4683.29,2782.33 cw(c4658.22,2757.26) 4693.68,2757.26 ; SD_CARD.2@4683.29,2782.33 cw(c4658.22,2757.26) 4693.68,2757.26 ; 4691.43,2705.57 cw(c4611.76,2625.91) R100.1@4724.43,2625.91 ; 4691.43,2705.57 cw(c4611.76,2625.91) R100.1@4724.43,2625.91 ; 4691.43,2705.57 cw(c4611.76,2625.91) R100.1@4724.43,2625.91 ; 4693.68,2757.26 cw(c4729.13,2757.26) SD_CARD.2@4704.06,2782.33 ; 4693.68,2757.26 cw(c4729.13,2757.26) SD_CARD.2@4704.06,2782.33 ; 4693.68,2757.26 cw(c4729.13,2757.26) SD_CARD.2@4704.06,2782.33 ; 4708.5,2688.5 cw(c4645.9,2625.91) R100.1@4734.43,2625.91 ; 4708.5,2688.5 cw(c4645.9,2625.91) R100.1@4734.43,2625.91 ; 4708.5,2688.5 cw(c4645.9,2625.91) R100.1@4734.43,2625.91 ; 4725.57,2671.43 cw(c4680.04,2625.91) R100.1@4744.43,2625.91 ; 4725.57,2671.43 cw(c4680.04,2625.91) R100.1@4744.43,2625.91 ; 4725.57,2671.43 cw(c4680.04,2625.91) R100.1@4744.43,2625.91 ; 4742.64,2654.36 cw(c4714.19,2625.91) R100.1@4754.43,2625.91 ; 4742.64,2654.36 cw(c4714.19,2625.91) R100.1@4754.43,2625.91 ; 4742.64,2654.36 cw(c4714.19,2625.91) R100.1@4754.43,2625.91
  Bottom Layer w10: v1@4444.46,1746.54 cw(c4460.07,1730.93) 4460.07,1753 ; v1@4448,1745 4456,1753 4495.37,1753 4565.16,1822.79 4565.16,2078.16 4746,2259 v1(4746,2625) ; v1@4451.54,1739.46 cw(c4484.21,1706.79) 4484.21,1753 ; v1@4742.46,2621.46 cw(c4733.93,2612.93) 4746,2612.93 ; v1@4742.46,2621.46 cw(c4733.93,2612.93) 4746,2612.93 ; v1@4742.46,2621.46 cw(c4733.93,2612.93) 4746,2612.93 ; 4746,2612.93 cw(c4758.07,2612.93) v1@4749.54,2621.46 ; 4746,2612.93 cw(c4758.07,2612.93) v1@4749.54,2621.46 ; 4746,2612.93 cw(c4758.07,2612.93) v1@4749.54,2621.46
SD_DAT0: J80.7 R98.1 SD_CARD.7 | length 2415.9
  Top Layer w7: v1@4509,1717 v1@4512,1714 ; R98.1@5086,2625.91 R98.1@5086,2633
  Top Layer w10: J80.7@4303.55,1790.25 4399.75,1790.25 4403,1787 4439,1787 4509,1717 v1@4509,1716 ; R98.1@5080,2633 5185.8,2738.8 SD_CARD.7@5185.8,2812.4 ; 4496.64,1729.36 cw(c4481.27,1714) v1@4503,1714 ; 4496.64,1729.36 cw(c4481.27,1714) v1@4503,1714 ; 4496.64,1729.36 cw(c4481.27,1714) v1@4503,1714 ; R98.1@5084,2625 cw(c5112.97,2625) R98.1@5092.49,2645.49 ; R98.1@5084,2625 cw(c5112.97,2625) R98.1@5092.49,2645.49 ; R98.1@5084,2625 cw(c5112.97,2625) R98.1@5092.49,2645.49 ; R98.1@5086.99,2646.5 ccw(c5086.99,2662.22) R98.1@5098.1,2651.1 ; R98.1@5086.99,2646.5 ccw(c5086.99,2662.22) R98.1@5098.1,2651.1 ; R98.1@5086.99,2646.5 ccw(c5086.99,2662.22) R98.1@5098.1,2651.1 ; R98.1@5087.58,2625.91 cw(c5122.99,2625.91) R98.1@5097.95,2650.95 ; R98.1@5087.58,2625.91 cw(c5122.99,2625.91) R98.1@5097.95,2650.95 ; R98.1@5087.58,2625.91 cw(c5122.99,2625.91) R98.1@5097.95,2650.95 ; R98.1@5097.58,2625.91 cw(c5157.13,2625.91) 5115.02,2668.02 ; R98.1@5097.58,2625.91 cw(c5157.13,2625.91) 5115.02,2668.02 ; R98.1@5097.58,2625.91 cw(c5157.13,2625.91) 5115.02,2668.02 ; R98.1@5107.58,2625.91 cw(c5191.28,2625.91) 5132.09,2685.09 ; R98.1@5107.58,2625.91 cw(c5191.28,2625.91) 5132.09,2685.09 ; R98.1@5107.58,2625.91 cw(c5191.28,2625.91) 5132.09,2685.09 ; SD_CARD.7@5175.42,2782.33 cw(c5150.35,2757.26) 5185.8,2757.26 ; SD_CARD.7@5175.42,2782.33 cw(c5150.35,2757.26) 5185.8,2757.26 ; SD_CARD.7@5175.42,2782.33 cw(c5150.35,2757.26) 5185.8,2757.26 ; 5185.8,2757.26 cw(c5221.26,2757.26) SD_CARD.7@5196.19,2782.33 ; 5185.8,2757.26 cw(c5221.26,2757.26) SD_CARD.7@5196.19,2782.33 ; 5185.8,2757.26 cw(c5221.26,2757.26) SD_CARD.7@5196.19,2782.33
  Bottom Layer w10: v1(4508,1714) 4510,1714 4601,1805 4601,2048 5078,2525 v1@5078,2627 ; v1@4508,1719 ccw(c4508,1735.9) 4519.95,1723.95 ; 5078,2610.51 cw(c5093.49,2610.51) v1@5082.54,2621.46 ; 5078,2610.51 cw(c5093.49,2610.51) v1@5082.54,2621.46 ; 5078,2610.51 cw(c5093.49,2610.51) v1@5082.54,2621.46
  other v1: 5079,2625
SD_DAT1: J80.76 R97.1 SD_CARD.8 | length 2830.3
  Top Layer w7: v1@4002.5,1723.5 v1@4005,1726
  Top Layer w10: v1@4004,1726 4028.88,1750.88 J80.76@4122.45,1750.88 ; R97.1@5184,2625 5249.78,2690.78 SD_CARD.8@5249.78,2812.4 ; R97.1@5186.99,2646.5 ccw(c5186.99,2691.19) 5218.59,2659.59 ; R97.1@5186.99,2646.5 ccw(c5186.99,2691.19) 5218.59,2659.59 ; R97.1@5186.99,2646.5 ccw(c5186.99,2691.19) 5218.59,2659.59 ; R97.1@5191,2621 cw(c5217.56,2621) R97.1@5198.78,2639.78 ; R97.1@5191,2621 cw(c5217.56,2621) R97.1@5198.78,2639.78 ; R97.1@5191,2621 cw(c5217.56,2621) R97.1@5198.78,2639.78 ; R97.1@5197.58,2625.91 cw(c5228.16,2625.91) R97.1@5206.53,2647.53 ; R97.1@5197.58,2625.91 cw(c5228.16,2625.91) R97.1@5206.53,2647.53 ; R97.1@5197.58,2625.91 cw(c5228.16,2625.91) R97.1@5206.53,2647.53 ; R97.1@5207.58,2625.91 cw(c5262.3,2625.91) 5223.61,2664.61 ; R97.1@5207.58,2625.91 cw(c5262.3,2625.91) 5223.61,2664.61 ; R97.1@5207.58,2625.91 cw(c5262.3,2625.91) 5223.61,2664.61 ; SD_CARD.8@5239.4,2782.33 cw(c5214.33,2757.26) 5249.78,2757.26 ; SD_CARD.8@5239.4,2782.33 cw(c5214.33,2757.26) 5249.78,2757.26 ; SD_CARD.8@5239.4,2782.33 cw(c5214.33,2757.26) 5249.78,2757.26 ; 5249.78,2757.26 cw(c5285.23,2757.26) SD_CARD.8@5260.16,2782.33 ; 5249.78,2757.26 cw(c5285.23,2757.26) SD_CARD.8@5260.16,2782.33 ; 5249.78,2757.26 cw(c5285.23,2757.26) SD_CARD.8@5260.16,2782.33 ; v1@4004,1732 ccw(c4004,1746.49) 4014.24,1736.24 cw(c4004,1746.49) v1@4004,1732 ; v1@4009,1727 cw(c4018.66,1727) 4011.83,1733.83 ccw(c4018.66,1727) v1@4009,1727
  Bottom Layer w10: v1(4004,1727) 4004,1732 4026,1754 4388,1754 4414,1728 4414,1696 4429,1681 4511,1681 4618,1788 4618,2033 5186,2601 v1@5186,2627 ; v1@4009,1727 cw(c4033.14,1727) 4016.07,1744.07 ; v1@4009,1727 cw(c4033.14,1727) 4016.07,1744.07 ; v1@4009,1727 cw(c4033.14,1727) 4016.07,1744.07 ; v1@5182.46,2617.46 cw(c5173.93,2608.93) 5186,2608.93 ; v1@5182.46,2617.46 cw(c5173.93,2608.93) 5186,2608.93 ; v1@5182.46,2617.46 cw(c5173.93,2608.93) 5186,2608.93 ; 5186,2608.93 cw(c5198.07,2608.93) v1@5189.54,2617.46 ; 5186,2608.93 cw(c5198.07,2608.93) v1@5189.54,2617.46 ; 5186,2608.93 cw(c5198.07,2608.93) v1@5189.54,2617.46
  other v1: 5186,2621
SD_DAT2: J80.75 R96.1 SD_CARD.9 | length 2399
  Top Layer w7: R96.1@4546,2625.91 R96.1@4546,2642
  Top Layer w10: v1@3959,1728 v1(3960,1728) 3970,1728 4012.57,1770.57 J80.75@4122.45,1770.57 ; SD_CARD.9@4496.83,2812.4 4496.83,2734.17 4544,2687 R96.1@4544,2642 ; SD_CARD.9@4486.44,2782.33 cw(c4461.37,2757.26) 4496.83,2757.26 ; SD_CARD.9@4486.44,2782.33 cw(c4461.37,2757.26) 4496.83,2757.26 ; SD_CARD.9@4486.44,2782.33 cw(c4461.37,2757.26) 4496.83,2757.26 ; 4496.83,2757.26 cw(c4532.28,2757.26) SD_CARD.9@4507.21,2782.33 ; 4496.83,2757.26 cw(c4532.28,2757.26) SD_CARD.9@4507.21,2782.33 ; 4496.83,2757.26 cw(c4532.28,2757.26) SD_CARD.9@4507.21,2782.33 ; R96.1@4530.46,2640.47 ccw(c4497.76,2673.16) 4544,2673.16 ; R96.1@4530.46,2640.47 ccw(c4497.76,2673.16) 4544,2673.16 ; R96.1@4530.46,2640.47 ccw(c4497.76,2673.16) 4544,2673.16 ; 4544,2653.93 ccw(c4573.04,2653.93) R96.1@4552.51,2633.39 ; 4544,2653.93 ccw(c4573.04,2653.93) R96.1@4552.51,2633.39 ; 4544,2653.93 ccw(c4573.04,2653.93) R96.1@4552.51,2633.39 ; 4544,2678.07 ccw(c4597.18,2678.07) R96.1@4559.58,2640.47 ; 4544,2678.07 ccw(c4597.18,2678.07) R96.1@4559.58,2640.47 ; 4544,2678.07 ccw(c4597.18,2678.07) R96.1@4559.58,2640.47 ; v1@3960,1733 ccw(c3960,1769.21) 3985.61,1743.61 cw(c3960,1769.21) v1@3960,1733
  Bottom Layer w10: 3949,1727 3941,1735 3941,1776 3953,1788 4405.89,1788 4406.89,1787 4479.59,1787 4531.16,1838.58 4531.16,2623.16 v1(4533,2625) ; 4531.16,2608.49 cw(c4549.51,2608.49) 4536.54,2621.46 ccw(c4549.51,2608.49) 4531.16,2608.49
SD_DAT3: J80.74 R101.1 SD_CARD.1 | length 2513.4
  Top Layer w7: v1@3969,1760 v1(3971,1762)
  Top Layer w10: v1(3971,1762) 3999.25,1790.25 J80.74@4122.45,1790.25 ; SD_CARD.1@4595.25,2812.4 4595.25,2737.75 4642,2691 R101.1@4642,2624 ; 3979.54,1770.54 cw(c3971,1779.07) 3971,1767 ccw(c3971,1779.07) 3979.54,1770.54 ; 3979.54,1770.54 ccw(c3988.07,1762) 3976,1762 cw(c3988.07,1762) 3979.54,1770.54 ; SD_CARD.1@4584.87,2782.33 cw(c4559.8,2757.26) 4595.25,2757.26 ; SD_CARD.1@4584.87,2782.33 cw(c4559.8,2757.26) 4595.25,2757.26 ; SD_CARD.1@4584.87,2782.33 cw(c4559.8,2757.26) 4595.25,2757.26 ; 4595.25,2757.26 cw(c4630.7,2757.26) SD_CARD.1@4605.64,2782.33 ; 4595.25,2757.26 cw(c4630.7,2757.26) SD_CARD.1@4605.64,2782.33 ; 4595.25,2757.26 cw(c4630.7,2757.26) SD_CARD.1@4605.64,2782.33 ; R101.1@4630.46,2640.47 ccw(c4602.59,2668.33) 4642,2668.33 ; R101.1@4630.46,2640.47 ccw(c4602.59,2668.33) 4642,2668.33 ; R101.1@4630.46,2640.47 ccw(c4602.59,2668.33) 4642,2668.33 ; R101.1@4642,2647.64 ccw(c4667.73,2647.64) R101.1@4649.54,2629.44 ; R101.1@4642,2647.64 ccw(c4667.73,2647.64) R101.1@4649.54,2629.44 ; R101.1@4642,2647.64 ccw(c4667.73,2647.64) R101.1@4649.54,2629.44 ; 4642,2658.76 ccw(c4677.87,2658.76) R101.1@4652.51,2633.39 ; 4642,2658.76 ccw(c4677.87,2658.76) R101.1@4652.51,2633.39 ; 4642,2658.76 ccw(c4677.87,2658.76) R101.1@4652.51,2633.39 ; 4642,2682.9 ccw(c4702.01,2682.9) R101.1@4659.58,2640.47 ; 4642,2682.9 ccw(c4702.01,2682.9) R101.1@4659.58,2640.47 ; 4642,2682.9 ccw(c4702.01,2682.9) R101.1@4659.58,2640.47
  Bottom Layer w7: v1@3969,1761 3969,1760 v1@3975,1760
  Bottom Layer w10: v1@3967.46,1765.54 cw(c3980.66,1752.34) 3980.66,1771 ; v1@3970,1761 v1(3971,1762) 3980,1771 4398.85,1771 4399.85,1770 4486.63,1770 4548.16,1831.53 4548.16,2107.16 4646,2205 v1(4646,2625.91) ; v1@3974.54,1758.46 cw(c4004.8,1728.2) 4004.8,1771 ; v1@4642.47,2622.37 cw(c4633.93,2613.83) 4646,2613.83 ; v1@4642.47,2622.37 cw(c4633.93,2613.83) 4646,2613.83 ; v1@4642.47,2622.37 cw(c4633.93,2613.83) 4646,2613.83 ; 4646,2613.83 cw(c4658.07,2613.83) v1@4649.54,2622.37 ; 4646,2613.83 cw(c4658.07,2613.83) v1@4649.54,2622.37 ; 4646,2613.83 cw(c4658.07,2613.83) v1@4649.54,2622.37
SDA: IIC.3 J80.63 JP43.5 RY2.1 | length 4769.8
  Top Layer w10: JP43.5@1378.35,935.02 cw(c1378.35,890.06) 1410.14,921.85 cw(c1441.93,953.64) JP43.5@1396.98,953.64 ; JP43.5@1378.35,953.64 1859,472.99 IIC.3@1859,339 ; 1638.87,693.12 cw(c1591.65,645.91) RY2.1@1658.43,645.91 ; RY2.1@1668.43,645.91 ccw(c1625.79,645.91) 1655.94,676.05 ccw(c1679.02,699.14) RY2.1@1679.02,666.5 ; RY2.1@1680.99,625.32 cw(c1680.99,563.29) 1724.84,607.15 ; RY2.1@1680.99,635.32 cw(c1680.99,597.43) 1707.77,624.22 ; RY2.1@1701.58,645.91 ccw(c1738.97,645.91) 1712.53,619.46 ; IIC.3@1842.66,357.34 ccw(c1803.2,396.8) 1859,396.8 ; IIC.3@1849.73,350.27 ccw(c1827.34,372.66) 1859,372.66 ; 1859,377.49 ccw(c1897.49,377.49) IIC.3@1870.27,350.27 ; 1859,401.63 ccw(c1921.63,401.63) IIC.3@1877.34,357.34 ; v1@3052.21,2006.79 J80.63@4122.45,2006.79
  Bottom Layer w7: JP43.5@1364.13,967.87 ccw(c1313.73,1018.26) 1385,1018.26 ; JP43.5@1369.08,962.92 ccw(c1330.63,1001.36) 1385,1001.36 ; JP43.5@1374.03,957.97 ccw(c1347.53,984.46) 1385,984.46 ; 1385,986.17 ccw(c1410.89,986.17) JP43.5@1392.58,967.87 ; 3017.64,2017 cw(c3017.64,1982.2) v1@3042.25,2006.81 ; 3034.54,2017 cw(c3034.54,1999.1) v1@3047.2,2011.76 ; v1@3041.25,2017 v1(3046.84,2011.4)
  Bottom Layer w10: JP43.5@1385,947 1385,1204 2198,2017 v1@3041.25,2017
SPI_CLK: ?.3 J80.52 JP44.26 | length 5647.9
  Top Layer w7: 3032,2991 JP44.26@3032,3149 ; 4094.31,2225.32 cw(c4094.31,2214.87) 4101.7,2222.26 ccw(c4096.73,2217.29) 4096.73,2224.32 ; JP44.26@3017.67,3144.13 cw(c2983.07,3109.53) 3032,3109.53 ; JP44.26@3017.67,3144.13 cw(c2983.07,3109.53) 3032,3109.53 ; JP44.26@3017.67,3144.13 cw(c2983.07,3109.53) 3032,3109.53 ; JP44.26@3022.62,3149.08 cw(c2999.97,3126.43) 3032,3126.43 ; JP44.26@3022.62,3149.08 cw(c2999.97,3126.43) 3032,3126.43 ; JP44.26@3022.62,3149.08 cw(c2999.97,3126.43) 3032,3126.43 ; 3032,3110.03 cw(c3080.22,3110.03) JP44.26@3046.12,3144.13 ; 3032,3110.03 cw(c3080.22,3110.03) JP44.26@3046.12,3144.13 ; 3032,3110.03 cw(c3080.22,3110.03) JP44.26@3046.12,3144.13 ; 3032,3126.93 cw(c3063.32,3126.93) JP44.26@3041.17,3149.08 ; 3032,3126.93 cw(c3063.32,3126.93) JP44.26@3041.17,3149.08 ; 3032,3126.93 cw(c3063.32,3126.93) JP44.26@3041.17,3149.08
  Top Layer w10: v1(1104,859) 1249,714 1249,611 ?.3@1300,560 ; 3032,2991 3798.68,2224.32 J80.52@4122.45,2224.32
  Bottom Layer w10: v1(1104,859) 1104,1230.47 JP44.26@3031.9,3158.36 ; 3000.11,3126.57 cw(c3031.9,3094.78) JP44.26@3031.9,3139.74 ; 3000.11,3126.57 ccw(c2968.32,3158.36) JP44.26@3013.27,3158.36 ; 3000.11,3126.57 cw(c3031.9,3094.78) JP44.26@3031.9,3139.74 ; 3000.11,3126.57 ccw(c2968.32,3158.36) JP44.26@3013.27,3158.36 ; 3000.11,3126.57 ccw(c2968.32,3158.36) JP44.26@3013.27,3158.36 ; 3000.11,3126.57 cw(c3031.9,3094.78) JP44.26@3031.9,3139.74
SPI_CS5: ?.4 J80.50 JP44.28 | length 5466.7
  Top Layer w7: 3188,2945 JP44.28@3188,3149 ; JP44.28@3175.15,3144.13 cw(c3144.12,3113.11) 3188,3113.11 ; JP44.28@3175.15,3144.13 cw(c3144.12,3113.11) 3188,3113.11 ; JP44.28@3175.15,3144.13 cw(c3144.12,3113.11) 3188,3113.11 ; JP44.28@3180.1,3149.08 cw(c3161.02,3130.01) 3188,3130.01 ; JP44.28@3180.1,3149.08 cw(c3161.02,3130.01) 3188,3130.01 ; JP44.28@3180.1,3149.08 cw(c3161.02,3130.01) 3188,3130.01 ; 3188,3106.46 cw(c3241.28,3106.46) JP44.28@3203.6,3144.13 ; 3188,3106.46 cw(c3241.28,3106.46) JP44.28@3203.6,3144.13 ; 3188,3106.46 cw(c3241.28,3106.46) JP44.28@3203.6,3144.13 ; 3188,3123.36 cw(c3224.38,3123.36) JP44.28@3198.66,3149.08 ; 3188,3123.36 cw(c3224.38,3123.36) JP44.28@3198.66,3149.08 ; 3188,3123.36 cw(c3224.38,3123.36) JP44.28@3198.66,3149.08
  Top Layer w10: v1(1307,809) 1348.34,767.66 1348.34,611.66 ?.4@1400,560 ; 3188,2945 3870.31,2262.69 J80.50@4122.45,2262.69
  Bottom Layer w10: v1@1305.5,807.5 1261,852 1261,1229.99 JP44.28@3189.38,3158.36 ; 3157.59,3126.57 cw(c3189.38,3094.78) JP44.28@3189.38,3139.74 ; 3157.59,3126.57 ccw(c3125.8,3158.36) JP44.28@3170.75,3158.36 ; 3157.59,3126.57 cw(c3189.38,3094.78) JP44.28@3189.38,3139.74 ; 3157.59,3126.57 ccw(c3125.8,3158.36) JP44.28@3170.75,3158.36 ; 3157.59,3126.57 ccw(c3125.8,3158.36) JP44.28@3170.75,3158.36 ; 3157.59,3126.57 cw(c3189.38,3094.78) JP44.28@3189.38,3139.74
SPI_CS6: J80.49 JP44.29 SPI.4 | length 5270.5
  Top Layer w7: 3266,2914 JP44.29@3266,3149 ; JP44.29@3253.89,3144.13 cw(c3224.65,3114.89) 3266,3114.89 ; JP44.29@3253.89,3144.13 cw(c3224.65,3114.89) 3266,3114.89 ; JP44.29@3253.89,3144.13 cw(c3224.65,3114.89) 3266,3114.89 ; JP44.29@3258.84,3149.08 cw(c3241.55,3131.79) 3266,3131.79 ; JP44.29@3258.84,3149.08 cw(c3241.55,3131.79) 3266,3131.79 ; JP44.29@3258.84,3149.08 cw(c3241.55,3131.79) 3266,3131.79 ; 3266,3104.67 cw(c3321.81,3104.67) JP44.29@3282.34,3144.13 ; 3266,3104.67 cw(c3321.81,3104.67) JP44.29@3282.34,3144.13 ; 3266,3104.67 cw(c3321.81,3104.67) JP44.29@3282.34,3144.13 ; 3266,3121.57 cw(c3304.91,3121.57) JP44.29@3277.4,3149.08 ; 3266,3121.57 cw(c3304.91,3121.57) JP44.29@3277.4,3149.08 ; 3266,3121.57 cw(c3304.91,3121.57) JP44.29@3277.4,3149.08
  Top Layer w10: v1@1382,808 1382,806 1400,788 SPI.4@1400,660 ; 3266,2914 3897.62,2282.38 J80.49@4122.45,2282.38
  Bottom Layer w10: v1@1382,805 v1(1382,807) 1382,886 1337,931 1337,1227.25 JP44.29@3268.12,3158.36 ; 3236.33,3126.57 cw(c3268.12,3094.78) JP44.29@3268.12,3139.74 ; 3236.33,3126.57 ccw(c3204.54,3158.36) JP44.29@3249.49,3158.36 ; 3236.33,3126.57 cw(c3268.12,3094.78) JP44.29@3268.12,3139.74 ; 3236.33,3126.57 ccw(c3204.54,3158.36) JP44.29@3249.49,3158.36 ; 3236.33,3126.57 ccw(c3204.54,3158.36) JP44.29@3249.49,3158.36 ; 3236.33,3126.57 cw(c3268.12,3094.78) JP44.29@3268.12,3139.74
SPI_CS7: ?.2@1200,560 J80.55 JP44.23 | length 5554.9
  Top Layer w7: 2792,3127 JP44.23@2792,3155 ; JP44.23@2784.14,3141.87 cw(c2773.59,3126.79) 2792,3126.79 ; JP44.23@2784.14,3141.87 cw(c2773.59,3126.79) 2792,3126.79 ; JP44.23@2784.14,3141.87 cw(c2773.59,3126.79) 2792,3126.79 ; 2792,3126.79 cw(c2804.72,3126.79) JP44.23@2801.22,3139.02 ; 2792,3126.79 cw(c2804.72,3126.79) JP44.23@2801.22,3139.02 ; 2792,3126.79 cw(c2804.72,3126.79) JP44.23@2801.22,3139.02 ; 4096.73,2165.27 cw(c4096.73,2158.23) 4101.7,2163.21 ccw(c4096.73,2158.23) 4096.73,2165.27
  Top Layer w10: v1@951,914 1152,713 1152,608 ?.2@1200,560 ; 2792,3127 3753.73,2165.27 J80.55@4122.45,2165.27
  Bottom Layer w10: v1(950,913) 943,920 943,1218 2795.68,3070.68 JP44.23@2795.68,3158.36 ; JP44.23@2782.51,3145.19 cw(c2750.72,3113.4) 2795.68,3113.4 ; JP44.23@2782.51,3145.19 cw(c2750.72,3113.4) 2795.68,3113.4 ; JP44.23@2782.51,3145.19 cw(c2750.72,3113.4) 2795.68,3113.4 ; 2795.68,3113.4 cw(c2840.63,3113.4) JP44.23@2808.84,3145.19 ; 2795.68,3113.4 cw(c2840.63,3113.4) JP44.23@2808.84,3145.19 ; 2795.68,3113.4 cw(c2840.63,3113.4) JP44.23@2808.84,3145.19
SPI_MISO: J80.54 JP44.24 SPI.2 | length 5635.6
  Top Layer w7: 2873,3096 JP44.24@2873,3155 ; JP44.24@2860.19,3144.13 cw(c2829.26,3113.2) 2873,3113.2 ; JP44.24@2860.19,3144.13 cw(c2829.26,3113.2) 2873,3113.2 ; JP44.24@2860.19,3144.13 cw(c2829.26,3113.2) 2873,3113.2 ; JP44.24@2865.14,3149.08 cw(c2846.16,3130.1) 2873,3130.1 ; JP44.24@2865.14,3149.08 cw(c2846.16,3130.1) 2873,3130.1 ; JP44.24@2865.14,3149.08 cw(c2846.16,3130.1) 2873,3130.1 ; 2873,3106.36 cw(c2926.41,3106.36) JP44.24@2888.64,3144.13 ; 2873,3106.36 cw(c2926.41,3106.36) JP44.24@2888.64,3144.13 ; 2873,3106.36 cw(c2926.41,3106.36) JP44.24@2888.64,3144.13 ; 2873,3123.26 cw(c2909.51,3123.26) JP44.24@2883.69,3149.08 ; 2873,3123.26 cw(c2909.51,3123.26) JP44.24@2883.69,3149.08 ; 2873,3123.26 cw(c2909.51,3123.26) JP44.24@2883.69,3149.08 ; 4096.73,2182.95 ccw(c4096.73,2189.99) 4101.7,2185.01 cw(c4096.73,2189.99) 4096.73,2182.95
  Top Layer w10: v1(1013,905) 1200,718 SPI.2@1200,660 ; 2873,3096 3785.05,2183.95 J80.54@4122.45,2183.95
  Bottom Layer w10: v1@1013,903.64 1013,1210 2874.42,3071.42 JP44.24@2874.42,3158.36 ; JP44.24@2861.25,3145.19 cw(c2829.46,3113.4) 2874.42,3113.4 ; JP44.24@2861.25,3145.19 cw(c2829.46,3113.4) 2874.42,3113.4 ; JP44.24@2861.25,3145.19 cw(c2829.46,3113.4) 2874.42,3113.4 ; 2874.42,3113.4 cw(c2919.37,3113.4) JP44.24@2887.58,3145.19 ; 2874.42,3113.4 cw(c2919.37,3113.4) JP44.24@2887.58,3145.19 ; 2874.42,3113.4 cw(c2919.37,3113.4) JP44.24@2887.58,3145.19
SPI_MOSI: J80.51 JP44.27 SPI.3 | length 5430.4
  Top Layer w7: 3110,2971 JP44.27@3110,3149 ; JP44.27@3096.41,3144.13 cw(c3063.59,3111.32) 3110,3111.32 ; JP44.27@3096.41,3144.13 cw(c3063.59,3111.32) 3110,3111.32 ; JP44.27@3096.41,3144.13 cw(c3063.59,3111.32) 3110,3111.32 ; JP44.27@3101.36,3149.08 cw(c3080.49,3128.22) 3110,3128.22 ; JP44.27@3101.36,3149.08 cw(c3080.49,3128.22) 3110,3128.22 ; JP44.27@3101.36,3149.08 cw(c3080.49,3128.22) 3110,3128.22 ; 3110,3108.25 cw(c3160.75,3108.25) JP44.27@3124.86,3144.13 ; 3110,3108.25 cw(c3160.75,3108.25) JP44.27@3124.86,3144.13 ; 3110,3108.25 cw(c3160.75,3108.25) JP44.27@3124.86,3144.13 ; 3110,3125.15 cw(c3143.85,3125.15) JP44.27@3119.91,3149.08 ; 3110,3125.15 cw(c3143.85,3125.15) JP44.27@3119.91,3149.08 ; 3110,3125.15 cw(c3143.85,3125.15) JP44.27@3119.91,3149.08
  Top Layer w10: v1(1201,806) 1300,707 SPI.3@1300,660 ; 3110,2971 3837.99,2243.01 J80.51@4122.45,2243.01
  Bottom Layer w10: v1@1202,805 v1(1201,806) 1181,826 1181,1228.73 JP44.27@3110.64,3158.36 ; 3078.85,3126.57 cw(c3110.64,3094.78) JP44.27@3110.64,3139.74 ; 3078.85,3126.57 ccw(c3047.06,3158.36) JP44.27@3092.01,3158.36 ; 3078.85,3126.57 cw(c3110.64,3094.78) JP44.27@3110.64,3139.74 ; 3078.85,3126.57 ccw(c3047.06,3158.36) JP44.27@3092.01,3158.36 ; 3078.85,3126.57 ccw(c3047.06,3158.36) JP44.27@3092.01,3158.36 ; 3078.85,3126.57 cw(c3110.64,3094.78) JP44.27@3110.64,3139.74
T_D: RS-232.3 U24.7 | length 292.5
  Top Layer w20: U24.7@2418,573 2418,494 RS-232.3@2569,343
TCK: J80.67 JP44.11 | length 3354.1
  Top Layer w7: JP44.11@1851,3155 1851,2820 2742.95,1928.05 ; JP44.11@1836.57,3144.13 cw(c1801.72,3109.29) 1851,3109.29 ; JP44.11@1836.57,3144.13 cw(c1801.72,3109.29) 1851,3109.29 ; JP44.11@1836.57,3144.13 cw(c1801.72,3109.29) 1851,3109.29 ; JP44.11@1841.52,3149.08 cw(c1818.62,3126.19) 1851,3126.19 ; JP44.11@1841.52,3149.08 cw(c1818.62,3126.19) 1851,3126.19 ; JP44.11@1841.52,3149.08 cw(c1818.62,3126.19) 1851,3126.19 ; 1851,3110.28 cw(c1898.88,3110.28) JP44.11@1865.02,3144.13 ; 1851,3110.28 cw(c1898.88,3110.28) JP44.11@1865.02,3144.13 ; 1851,3110.28 cw(c1898.88,3110.28) JP44.11@1865.02,3144.13 ; 1851,3127.18 cw(c1881.98,3127.18) JP44.11@1860.07,3149.08 ; 1851,3127.18 cw(c1881.98,3127.18) JP44.11@1860.07,3149.08 ; 1851,3127.18 cw(c1881.98,3127.18) JP44.11@1860.07,3149.08
  Top Layer w10: 2742.95,1928.05 J80.67@4122.45,1928.05
TDI: J80.68 JP44.10 | length 3429.1
  Top Layer w7: JP44.10@1773,3155 1773,2839 2703.64,1908.36 ; JP44.10@1757.83,3144.13 cw(c1721.19,3107.5) 1773,3107.5 ; JP44.10@1757.83,3144.13 cw(c1721.19,3107.5) 1773,3107.5 ; JP44.10@1757.83,3144.13 cw(c1721.19,3107.5) 1773,3107.5 ; JP44.10@1762.78,3149.08 cw(c1738.09,3124.4) 1773,3124.4 ; JP44.10@1762.78,3149.08 cw(c1738.09,3124.4) 1773,3124.4 ; JP44.10@1762.78,3149.08 cw(c1738.09,3124.4) 1773,3124.4 ; 1773,3112.07 cw(c1818.35,3112.07) JP44.10@1786.28,3144.13 ; 1773,3112.07 cw(c1818.35,3112.07) JP44.10@1786.28,3144.13 ; 1773,3112.07 cw(c1818.35,3112.07) JP44.10@1786.28,3144.13 ; 1773,3128.97 cw(c1801.45,3128.97) JP44.10@1781.33,3149.08 ; 1773,3128.97 cw(c1801.45,3128.97) JP44.10@1781.33,3149.08 ; 1773,3128.97 cw(c1801.45,3128.97) JP44.10@1781.33,3149.08
  Top Layer w10: 2703.64,1908.36 J80.68@4122.45,1908.36